# Altium PCB FAT90V2(kontroller_only).PcbDoc (part 1 of 2)
Units mm, origin at the board's own origin, x right, y up, seen from the top; angles counter-clockwise.
Board outline 187.3 x 121.8 mm, 2 copper layers (Top Layer, Bottom Layer); 106 components, 130 nets, 363 pads, 457 vias.
Unrouted connection lines stored in the file: 5.
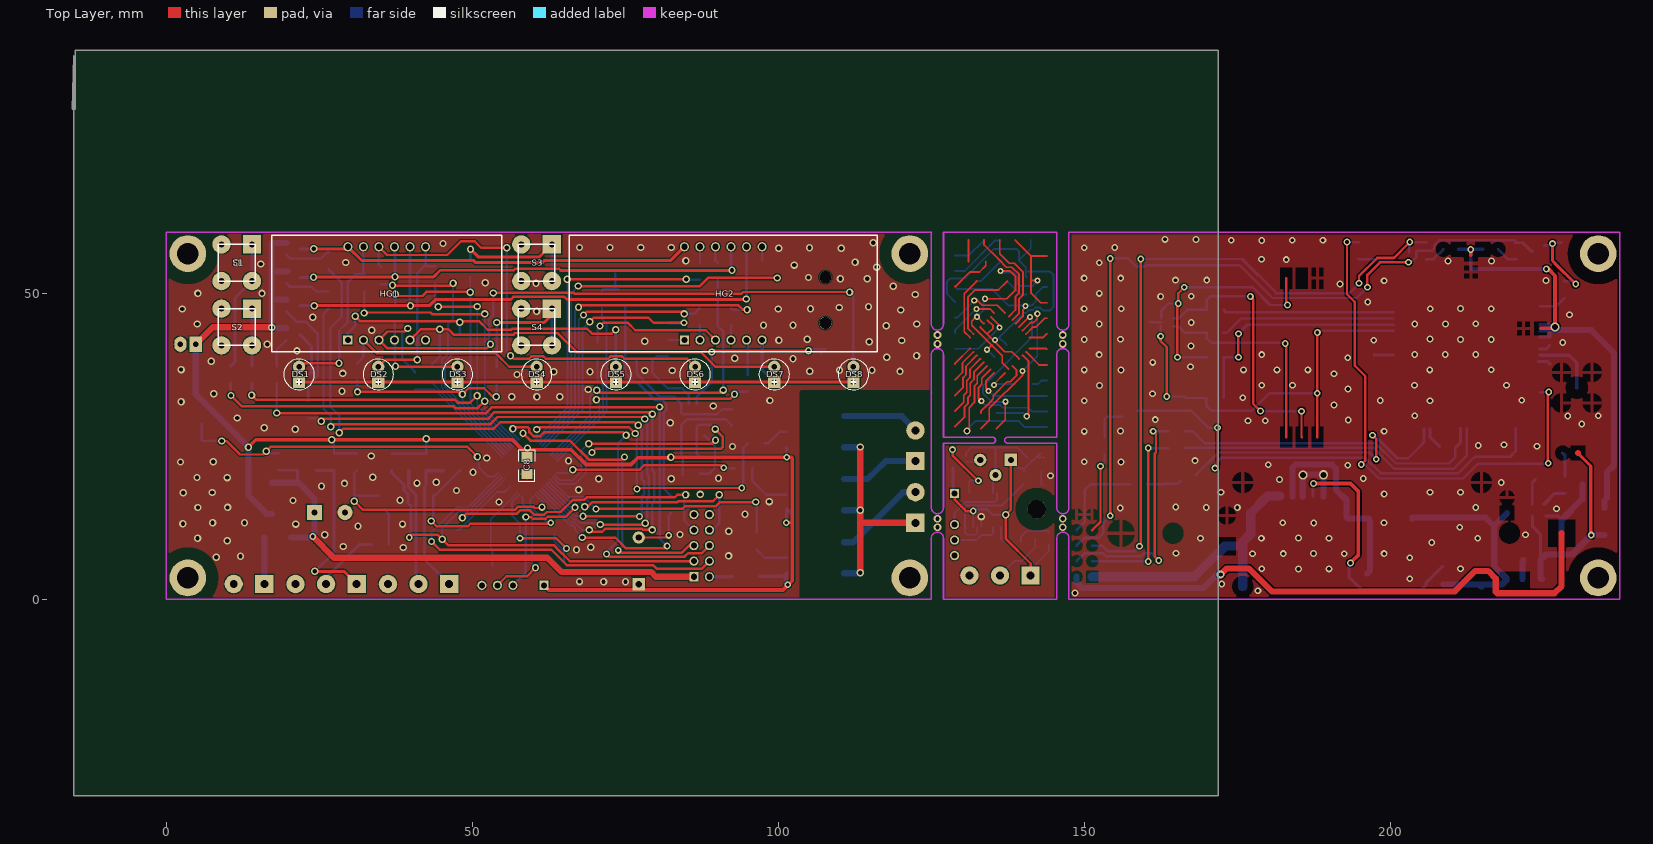
[diagram p0: Top Layer view]
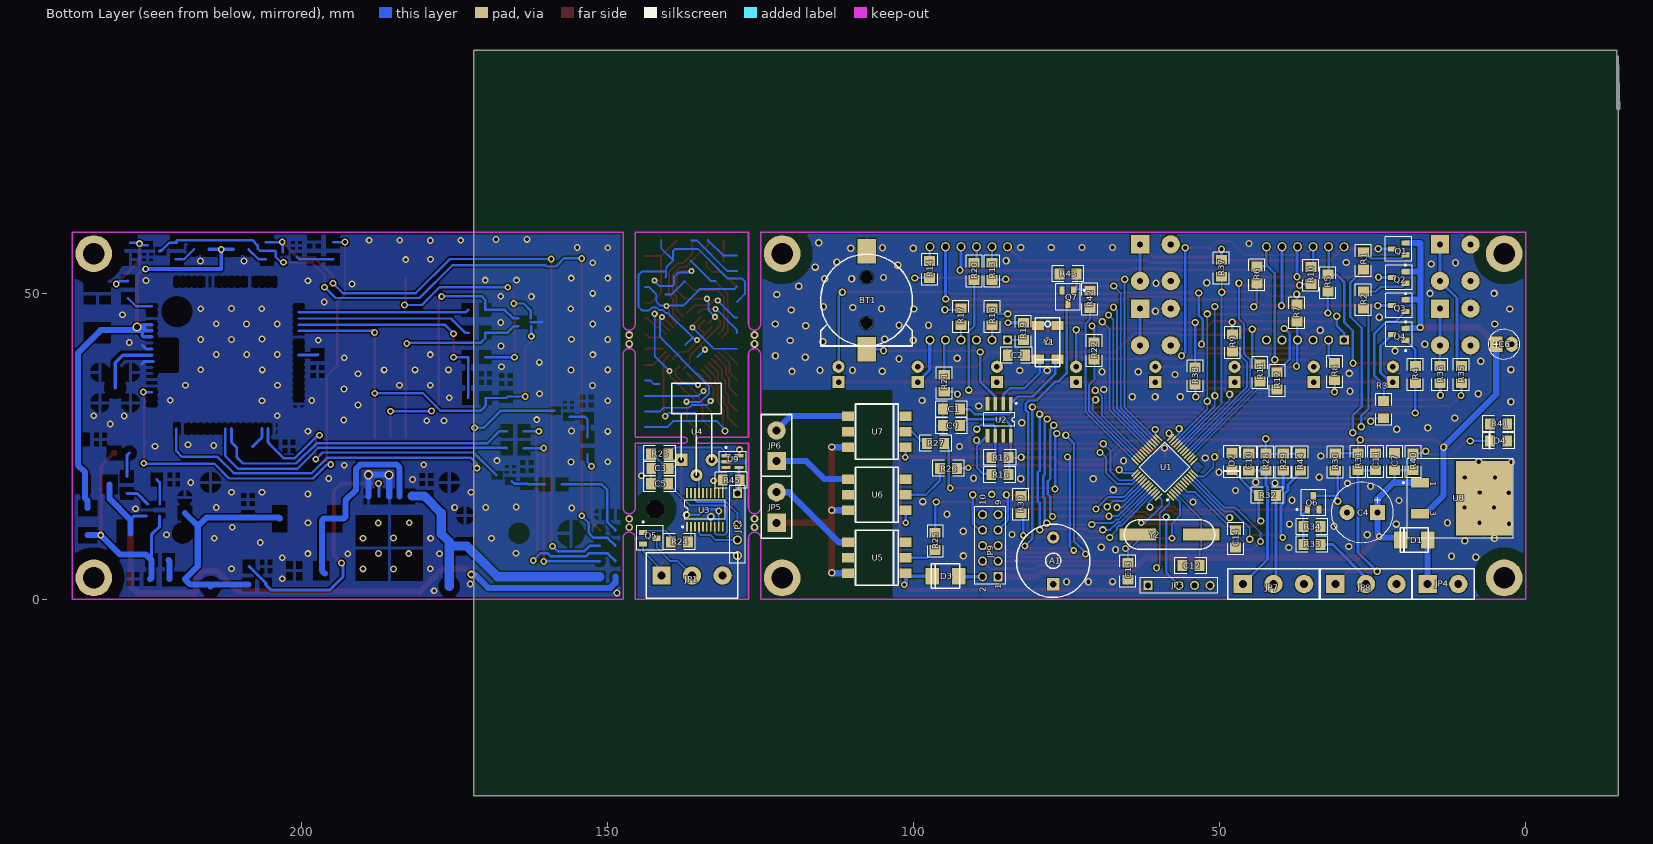
[diagram p1: Bottom Layer view, seen from below]

## Layer stack, top to bottom
Top Layer: signal copper 0.0356
Dielectric: dielectric 0.32, FR-4, Dk 4.8
Bottom Layer: signal copper 0.0356

## Board outline
-15.15,88.8 -15.15,-32.075 171.925,-32.075 171.925,89.725 -14.925,89.725 -14.925,80.075 -15.375,80.075

## Design rules (kind name [scope] priority, off if disabled: settings)
Clearance Clearance_1 [HasPad('Free-0') vs InPoly] p1: gap=2
Clearance [All] p2: gap=0.2
ComponentClearance [All] p1: gap=0.254 collisioncheckmode=0
HoleSize [All] p1: absolutevalues=TRUE maxlimit=5 minlimit=0.025 maxpercent=80.000 minpercent=20.000
PolygonConnect [All] p1: connectstyle=Relief reliefconductorwidth=0.254 reliefentries=4 polygonreliefangle="90 Angle"
RoutingLayers [All] p1: top layer=Horizontal bottom layer=Vertical
RoutingVias [All] p1: holewidth=0.6 width=1.1 viastyle="Through Hole" minholewidth=0.6 minwidth=1.1 maxholewidth=1 maxwidth=1.5
SolderMaskExpansion [All] p1: expansion=0.102
TestPointUsage [All] p1: valid=0 allowmultiple=FALSE
Testpoint [All] p1: side=15 testpointundercomponent=TRUE minsize=1.016 maxsize=2.54 preferedsize=1.524 minholesize=0 maxholesize=1.016 preferedholesize=0.813 testpointgrid=0.025 style=1023 order=1234567890
Width [All] p1: maxlimit=3 minlimit=0.2 preferedwidth=0.254 toplayer_prefwidth=1 bottomlayer_prefwidth=1 minimp=50.000000 maximp=50.000000 favimp=50.000000
15 further rules are at their usual default settings.

## Classes and differential pairs
component class main: A1 BT1 C1 C2 C4 C6 C7 C8 C9 C10 C11 C12 C13 C14 D1 D2 D3 D4 DS1 DS2 DS3 DS4 DS5 DS6 DS7 DS8 HG1 HG2 JP3 JP4 JP5 JP6 JP7 JP8 JP? Q1 Q2 Q3 Q4 Q6 Q7 R1 R2 R3 R4 R5 R6 R7 R8 R9 R10 R11 R12 R13 R14 R15 R16 R17 R18 R19 R20 R21 R22 R25 R26 R27 R28 R29 R30 R31 R32 R33 R34 R35 R36 R37 R38 R39 R40 R41 R42 R43 R44 S1 S2 S3 S4 U1 U2 U5 U6 U7 U8 Y1 Y2
component class Dat: C3 C5 JP1 JP2 Q5 R23 R24 R45 U3 U4 U9
component class AM: C200 C201 C202 C203 JP200 JP201 JP202 JP203 R200 R201 U200 Y200

## Components (designator, comment, footprint, x,y, rotation, side; value= is the part's Value field where it differs from the comment)
A1 "HCM1205X" zumm 77.2,6.3 r90 bottom
BT1 "CR1220" 1220_holder 107.7,48.9 r270 bottom
C1 "22pF" _1206 93.8,31.1 r180 bottom
C2 "22pF" _1206 83.2,39.9 r180 bottom
C3 "1.0x16" _1206 141.5,21.4 r0 bottom
C4 "470x25" el5 29.2,14.2 r180 bottom
C5 "1.0x16" _1206 141.5,18.9 r180 bottom
C6 "220x16" el3#1 4.8,41.7 r180 bottom
C7 "1.0x16" _1206 21.4,22.5 r270 bottom
C8 "1.0x16" _1206 58.9,21.9 r90 top
C9 "1.0x16" _1206 93.8,28.4 r180 bottom
C10 "1.0x16" _1206 45.25,22.425 r90 bottom
C11 "1.0x16" _1206 24.5,22.5 r90 bottom
C12 "10pF" _1206 54.7,5.5 r180 bottom
C13 "10pF" _1206 65,4.6 r90 bottom
C14 "1.0x16" _1206 47.4,9.9 r90 bottom
D1 "STPS1H100" mbrs140 18.2,9.7 r180 bottom
D2 "C4V7" _1206d 48,22.5 r90 bottom
D3 "STPS1H100" MBRS140 94.8,3.8 r180 bottom
D4 "C4V7" _1206d 4.4,25.9 r180 bottom
DS1 "LED0" el3#2 21.675,35.5 r90 top
DS2 "LED0" el3#2 34.618,35.5 r90 top
DS3 "LED0" el3#2 47.561,35.5 r90 top
DS4 "LED0" el3#2 60.504,35.5 r90 top
DS5 "LED0" el3#2 73.446,35.5 r90 top
DS6 "LED0" el3#2 86.389,35.5 r90 top
DS7 "LED0" el3#2 99.332,35.5 r90 top
DS8 "LED0" el3#2 112.275,35.5 r90 top
HG1 "HS310561K" HS310561K 36,50 r0 top
HG2 "HS410561K" HS410561K 91,50 r0 top
JP1 "DG306-5.0-03P" BT5-3 141.224,3.9 r180 bottom
JP2 "" HDR1X5_uart 128.8,17.3 r270 bottom
JP3 "" HDR1X5_uart 61.7,2.3 r180 bottom
JP4 "DG306-5.0-02P" BT5-2 16.012,2.5 r180 bottom
JP5 "DG306-5.0-02P" BT5-2 122.4,12.506 r90 bottom
JP6 "DG306-5.0-02P" BT5-2 122.4,22.6 r90 bottom
JP7 "DG306-5.0-03P" BT5-3 46.2,2.5 r180 bottom
JP8 "DG306-5.0-03P" BT5-3 31.1,2.5 r180 bottom
JP9 "PBD-10" HDR2X5 86.2,3.7 r90 bottom (schematic designator JP500)
Q1 "BC807" SO-G3#1 20.75,57.274 r90 bottom
Q2 "BC807" SO-G3#2 15.7,52.6 r90 bottom
Q3 "BC807" SO-G3#1 20.7,48 r90 bottom
Q4 "BC807" SO-G3#1 20.7,43.3 r90 bottom
Q5 "BC807" SO-G3#1 143.1,10 r270 bottom
Q6 "BC847" SO-G3#1 34.7,15.8 r180 bottom
Q7 "BC847" SO-G3#1 74.8,49.4 r0 bottom
R1 "3K0" _1206 26.5,55.3 r270 bottom
R2 "3K0" _1206 26.5,48.9 r270 bottom
R3 "3K0" _1206 23.2,31 r270 bottom
R4 "3K0" _1206 18,36.7 r270 bottom
R5 "100R" _1206 32.3,51.7 r270 bottom
R6 "100R" _1206 43.9,53 r270 bottom
R7 "100R" _1206 37.4,46.8 r90 bottom
R8 "100R" _1206 31.2,37.2 r270 bottom
R9 "100R" _1206 47.9,41.9 r270 bottom
R10 "100R" _1206 35.1,52.9 r270 bottom
R11 "100R" _1206 43.4,37 r270 bottom
R12 "100R" _1206 40.6,35.7 r270 bottom
R13 "100R" _1206 87.2,53.6 r270 bottom
R14 "100R" _1206 97.4,53.9 r270 bottom
R15 "5K1" _1206 85.925,23.175 r0 bottom
R16 "5K1" _1206 85.925,20.375 r0 bottom
R17 "100R" _1206 92.3,46.2 r90 bottom
R18 "100R" _1206 87.2,46.2 r90 bottom
R19 "100R" _1206 82.1,43.8 r90 bottom
R20 "100R" _1206 90.1,53.6 r270 bottom
R21 "100R" _1206 95,35.3 r270 bottom
R22 "100R" _1206 70.5,40.6 r270 bottom
R23 "3K0" _1206 141.5,23.8 r180 bottom
R24 "3K0" _1206 138.3,9.4 r0 bottom
R25 "K51" _1206 96.5,9.5 r90 bottom
R26 "K51" _1206 94.3,21.4 r180 bottom
R27 "K51" _1206 96.4,25.5 r180 bottom
R28 "100R" _1206 42.45,22.425 r90 bottom
R29 "5K1" _1206 39.6,22.4 r270 bottom
R30 "3K0" _1206 31.1,22.4 r270 bottom
R31 "10R" _1206 27.4,22.5 r90 bottom
R32 "100R" _1206 42.2,17 r180 bottom
R33 "5K1" _1206 34.9,9 r180 bottom
R34 "10K" _1206 34.9,11.9 r180 bottom
R35 "1K0" _1206 10.5,36.7 r270 bottom
R36 "1K0" _1206 14,36.7 r270 bottom
R37 "1K0" _1206 49.7,54.1 r270 bottom
R38 "1K0" _1206 54,36.5 r270 bottom
R39 "22R" _1206 82.5,15.5 r90 bottom
R40 "10K" _1206 18.4,22.5 r90 bottom
R41 "5K1" _1206 4.4,28.7 r180 bottom
R42 "5K1" _1206 71.2,49.025 r270 bottom
R43 "10K" _1206 74.8,53.2 r0 bottom
R44 "2K0" _1206 36.8,22.4 r270 bottom
R45 "3K0" _1206 129.8,19.5 r180 bottom
S1 "SWT-6-13mm" SWT-6 14,58 r270 top
S2 "SWT-6-13mm" SWT-6 14,47.5 r270 top
S3 "SWT-6-13mm" SWT-6 63,58 r270 top
S4 "SWT-6-13mm" SWT-6 63,47.5 r270 top
U1 "STM8S007C8" F-QFP7X7-G48/X.3N 59,21.6 r45 bottom
U2 "DS1307Z" SO-G8/Z7.45 86.025,29.375 r0 bottom
U3 "STM8S103F" TSSO6x6-G20/Y1.6 134.124,14.6 r180 bottom
U4 "DS18B20" DS18B20_H 138,20.3 r90 bottom
U5 "MOC3083S" smdip6 106.025,6.8 r90 bottom
U6 "MOC3083S" smdip6 106.025,17.1 r90 bottom
U7 "MOC3083S" smdip6 106.025,27.4 r90 bottom
U8 "MC7805ACD2T" D2PAK 12,16.5 r270 bottom
U9 "DS1775" SO-G5/P.95 129.6,22.5 r270 bottom
Y1 "32768" TMXLi-206 78.1,42 r180 bottom
Y2 "10MGz" hc49/us 58.2,10.6 r0 bottom

## Footprints (in the part's own frame and the unit in brackets; to place one, negate y for a bottom-side part, rotate by r counter-clockwise, add the part's x,y. Pads: shape width x height; smd on the part's side, far side on the other; paste and mask are expansions set on the pad)
1220_holder [mm]
  round 2 hole 2: 0(-3.75,0) 0(3.75,0)
  rect 4x3 smd: 1(8,0) 2(-8,0)
  silkscreen extent -7.5,-7.5 7.52,7.5
_1206 [mm]
  rect 1.6x1.8 smd: 1(-1.412,-0.007) 2(1.388,-0.007)
  silkscreen extent -2.61,-1.31 2.59,1.29
_1206d [mm]
  rect 1.6x1.8 smd: 1(1.395,-0.009) 2(-1.405,-0.009)
  silkscreen extent -2.6,-1.31 2.6,1.29
BT5-2 [mm]
  rect 3x3 hole 1.3: 1(0.006,0.008)
  round 3 hole 1.3: 2(5.006,0.008)
  silkscreen extent -2.49,-2.49 7.61,2.51
BT5-3 [mm]
  round 2 on Bottom Overlay: 0(-0.001,-4.001)
  rect 3x3 hole 1.3: 1(-0.001,-0.001)
  round 3 hole 1.3: 2(4.999,-0.001) 3(9.999,-0.001)
  silkscreen extent -2.5,-3.75 12.5,3.75
D2PAK [mm]
  rect 1.5x3 smd: 1(-2.558,-5.253) 3(2.522,-5.253)
  rect 12.2x9.3 smd: 4(-0.018,5.247)
  silkscreen extent -6.52,-8.1 6.48,10
DS18B20_H [mm]
  rect 2x2 hole 1: 1(2.5,0)
  round 2 hole 1: 2(0,-2.5) 3(2.5,-5)
  silkscreen extent 0,-6.53 15,1.53
el3#1 [mm]
  rect 2x2.5 hole 0.9: 1(0.011,-0.008)
  oval 2x2.5 hole 0.9: 2(2.511,-0.008)
  silkscreen extent -1.24,-2.51 3.76,2.49
el3#2 [mm]
  rect 2x2 hole 0.9: 1(0.011,-0.008)
  round 2 hole 0.9: 2(2.511,-0.008)
  silkscreen extent -1.24,-2.51 3.76,2.49
el5 [mm]
  rect 2.5x2.5 hole 1: 1(5.001,0.007)
  round 2.5 hole 1: 2(0.001,0.007)
  silkscreen extent -2.5,-4.99 7.5,5.01
F-QFP7X7-G48/X.3N [mm]
  rect 1.6x0.3 smd: 1(-4.1,2.75) 2(-4.1,2.25) 3(-4.1,1.75) 4(-4.1,1.25) 5(-4.1,0.75) 6(-4.1,0.25) 7(-4.1,-0.25) 8(-4.1,-0.75) 9(-4.1,-1.25) 10(-4.1,-1.75) 11(-4.1,-2.25) 12(-4.1,-2.75) 25(4.1,-2.75) 26(4.1,-2.25) 27(4.1,-1.75) 28(4.1,-1.25) 29(4.1,-0.75) 30(4.1,-0.25) 31(4.1,0.25) 32(4.1,0.75) 33(4.1,1.25) 34(4.1,1.75) 35(4.1,2.25) 36(4.1,2.75)
  rect 0.3x1.6 smd: 13(-2.75,-4.1) 14(-2.25,-4.1) 15(-1.75,-4.1) 16(-1.25,-4.1) 17(-0.75,-4.1) 18(-0.25,-4.1) 19(0.25,-4.1) 20(0.75,-4.1) 21(1.25,-4.1) 22(1.75,-4.1) 23(2.25,-4.1) 24(2.75,-4.1) 37(2.75,4.1) 38(2.25,4.1) 39(1.75,4.1) 40(1.25,4.1) 41(0.75,4.1) 42(0.25,4.1) 43(-0.25,4.1) 44(-0.75,4.1) 45(-1.25,4.1) 46(-1.75,4.1) 47(-2.25,4.1) 48(-2.75,4.1)
  silkscreen extent -4.22,-2.9 2.9,3.57
hc49/us [mm]
  rect 6x2 smd: 1(-5.2,0) 2(5.2,0)
  silkscreen extent -7.4,-2.4 7.4,2.4
HDR1X5_uart [mm]
  rect 1.5x1.5 hole 1: 1(-0.008,-0.009)
  round 1.5 hole 1: 3(5.072,-0.009) 4(7.612,-0.009) 5(10.152,-0.009)
  silkscreen extent -1.28,-1.28 11.42,1.26
HDR2X5 [mm]
  rect 1.5x1.5 hole 1: 1(0,0)
  round 1.5 hole 1: 2(0,2.54) 3(2.54,0) 4(2.54,2.54) 5(5.08,0) 6(5.08,2.54) 7(7.62,0) 8(7.62,2.54) 9(10.16,0) 10(10.16,2.54)
  silkscreen extent -1.27,-1.27 11.43,3.81
HS310561K [mm]
  rect 1.5x1.5 hole 1: 1(-6.35,-7.62)
  round 1.5 hole 1: 2(-3.81,-7.62) 3(-1.27,-7.62) 4(1.27,-7.62) 5(3.81,-7.62) 6(6.35,-7.62) 7(6.35,7.62) 8(3.81,7.62) 9(1.27,7.62) 10(-1.27,7.62) 11(-3.81,7.62) 12(-6.35,7.62)
  silkscreen extent -18.8,-9.5 18.8,9.5
HS410561K [mm]
  rect 1.5x1.5 hole 1: 1(-6.35,-7.62)
  round 1.5 hole 1: 2(-3.81,-7.62) 3(-1.27,-7.62) 4(1.27,-7.62) 5(3.81,-7.62) 6(6.35,-7.62) 7(6.35,7.62) 8(3.81,7.62) 9(1.27,7.62) 10(-1.27,7.62) 11(-3.81,7.62) 12(-6.35,7.62)
  silkscreen extent -25.2,-9.5 25.2,9.5
mbrs140 [mm]
  rect 2.2x2.7 smd: 1(2.2,0) 2(-2.2,0)
  silkscreen extent -2.3,-2.02 2.3,2
MBRS140 [mm]
  rect 2.2x2.7 smd: 1(2.2,0) 2(-2.2,0)
  silkscreen extent -2.3,-2.02 2.3,2
smdip6 [mm]
  rect 1.6x2 smd: 1(-2.54,-4.7) 2(0,-4.7) 3(2.54,-4.7) 4(2.54,4.7) 5(0,4.7) 6(-2.54,4.7)
  silkscreen extent -4.5,-3.5 4.5,3.5
SO-G3#1 [mm]
  rect 0.85x1.3 smd: 1(-0.948,-1.102) 2(0.952,-1.102) 3(0.002,1.098)
  silkscreen extent -2.77,-2.15 2,2.15
SO-G3#2 [mm]
  rect 0.85x1.3 smd: 1(-0.948,3.906) 2(0.952,3.906) 3(0.002,6.106)
  silkscreen extent -2.77,2.86 2,7.16
SO-G5/P.95 [mm]
  rect 0.55x1.45 smd: 1(-0.95,-1.075) 2(0,-1.075) 3(0.95,-1.075) 4(0.95,1.075) 5(-0.95,1.075)
  silkscreen extent -2.42,-2.2 1.65,2.2
SO-G8/Z7.45 [mm]
  rect 0.6x2.2 smd: 1(-1.905,-2.625) 2(-0.635,-2.625) 3(0.635,-2.625) 4(1.905,-2.625) 5(1.905,2.625) 6(0.635,2.625) 7(-0.635,2.625) 8(-1.905,2.625)
  silkscreen extent -2.88,-2.79 2.5,1.13
SWT-6 [mm]
  rect 3x3 hole 1: 1(-0.009,-0.001)
  round 3 hole 1: 1(5.991,-0.001) 2(-0.009,-5.001) 2(5.991,-5.001)
  silkscreen extent -0.01,-5.5 5.99,0.5
TMXLi-206 [mm] "TMXLi-206"
  rect 2x1.5 smd: 1(-1.6,-2.75) 2(1.6,-2.75) 3(1.6,2.75) 4(-1.6,2.75)
  silkscreen extent -2,-4 2,4
TSSO6x6-G20/Y1.6 [mm]
  rect 0.3x1.6 smd: 1(-2.934,-2.743) 2(-2.284,-2.743) 3(-1.634,-2.743) 4(-0.984,-2.743) 5(-0.334,-2.743) 6(0.316,-2.743) 7(0.966,-2.743) 8(1.616,-2.743) 9(2.266,-2.743) 10(2.916,-2.743) 11(2.916,2.757) 12(2.266,2.757) 13(1.616,2.757) 14(0.966,2.757) 15(0.316,2.757) 16(-0.334,2.757) 17(-0.984,2.757) 18(-1.634,2.757) 19(-2.284,2.757) 20(-2.934,2.757)
  silkscreen extent -3.76,-2.87 3.29,1.56
zumm [mm]
  rect 2x2 hole 1: 1(-3.825,0)
  round 2 hole 1: 2(3.81,0)
  silkscreen extent -6,-6 6,6

## Part data
A1: library part PJEZ0, "Beeper"
BT1: library part Battery, "Multicell Battery"
C1 C2 C3 C5 C12 C13 C14: library part "Cap Semi", "Capacitor"
C4: library part "Cap Pol1", "Polarized Capacitor (Radial)"
C6: library part "Cap Pol", "Polarized Capacitor (Radial)"
C7 C8 C9 C10 C11: library part Cap, "Capacitor"
D1 D3: library part 10BQ015, "Schottky Rectifier"
D2 D4: library part "D Zener", "Zener Diode"
DS1 DS2 DS3 DS4 DS5 DS6 DS7 DS8: "Typical INFRARED GaAs LED"
JP1 JP7 JP8: library part "Header 3", "Header, 3-Pin"
JP2 JP3: library part SWIM_CONN
JP4 JP5 JP6: library part "Header 2", "Header, 2-Pin"
JP9: library part "Header 10", "Header, 10-Pin"
Q1 Q2 Q3 Q4 Q5: library part BC857ALT1, "General Purpose Transistor PNP Silicon"
Q6 Q7: library part BC847ALT1, "General Purpose Transistor NPN Silicon"
R1 R2 R3 R4 R5 R6 R7 R8 R9 R10 R11 R12 R13 R14 R15 R16 R17 R18 R19 R20 R21 R22 R23 R24 R25 R26 R27 R28 R29 R30 R31 R32 R33 R34 R35 R36 R37 R38 R39 R40 R41 R42 R43 R44 R45: library part Res2, "Resistor"
S1 S2 S3 S4: library part SWT-6, "Switch"
U2: "64 X 8 Serial Real-Time Clock"
U5 U6 U7: library part "Opto TRIAC", "Opto-Triac"
U8: "Three-Terminal Positive Voltage Regulator"
Y1 Y2: library part XTAL, "Crystal Oscillator"

## Free pads (board coordinates)
  round 6 hole 3.5: 0(3.5,3.5) 0(3.5,56.5) 0(121.5,56.5) 1(121.5,3.5) 4(234,3.5) 4(234,56.5)
  round 3 hole 3: 0(142.25,14.725)

## Via types
v1: diameter 1.2, hole 0.7, Top Layer to Bottom Layer, 232 vias
v2: diameter 1.1, hole 0.6, Top Layer to Bottom Layer, 195 vias
v3: diameter 1, hole 0.5, Top Layer to Bottom Layer, 18 vias
v4: diameter 1.27, hole 0.7, Top Layer to Bottom Layer, 8 vias
v5: diameter 1.5, hole 1, Top Layer to Bottom Layer, 3 vias
v6: diameter 1.3, hole 0.7, Top Layer to Bottom Layer, 1 vias

## Nets (pads, with @x,y where several pads share a name; then routed paths per layer and width w, separated by ;. In a path a pad name is that pad's centre, name@x,y a point inside that pad or via, vN(x,y) a via of type N, cw(c..) or ccw(c..) an arc to the next point about the centre after c; other vN are vias at no path point)
+5V: A1.1 C6.1 C8.2 C9.2 D3.2 JP3.1 Q1.2 Q2.2 Q3.2 Q4.2 R15.1 R16.1 R28.2 R29.1 R30.1 R31.2 R44.1 U1.7 U1.8 U1.13 U1.32 U2.8 U5.1 U6.1 U7.1 U8.3 | length 271.2
  Top Layer w0.4: v2(101.3,12.525) 101.325,12.5 102.29,12.5
  Top Layer w0.6: v1@13.388,24.863 14.6,26.075 56.55,26.075 58.2,24.425 66.175,24.425 68.575,22.025 75.925,22.025 77.05,23.15 v1@82.4,23.15 ; v2@58.9,24.425 v2@58.907,24.418 ; C8.2@58.907,23.287 58.907,24.607 v2(59.025,24.725) ; JP3.1@61.708,2.291 62.473,1.525 100.775,1.525 102.29,3.04 102.29,23.085 102.175,23.2 v1(82.45,23.2)
  Top Layer w1: C6.1@4.789,41.692 7.572,44.475 17.25,44.475 v1(17.2,44.425)
  Bottom Layer w0.4: v1(27,26.075) 27.393,25.682 R31.2@27.393,23.888 31.031,23.888 R30.1@31.107,23.812 ; R44.1@36.806,23.812 R29.1@39.607,23.812 R28.2@42.443,23.813 ; R28.2@42.443,23.813 42.443,26.193 v1(42.475,26.225) ; v1(82.45,23.2) 82.55,23.1 R15.1@84.375,23.1 ; R16.1@84.375,20.375 84.375,23.319 84.12,23.574 84.12,28.425 85.095,29.4 91.406,29.4 C9.2@92.412,28.393 ; v2(101.3,12.525) 101.325,12.55 U6.1@101.325,14.56 ; U7.1@101.325,24.86 101.325,23.3 v2(101.4,23.225)
  Bottom Layer w0.6: D3.2@97,3.8 100.865,3.8 U5.1@101.325,4.26 ; U5.1@100.975,3.8 U5.1@101.025,3.75 ; U5.1@101.025,3.8 101.087,3.862 101.25,4.025 101.25,2.7 v2(101.55,2.4) ; U7.1@101.375,24.5 U7.1@101.4,24.525 ; U6.1@101.4,14.75 U6.1@102.1,14.05
  Bottom Layer w1: C6.1@4.789,41.692 4.789,33.511 v1@13.425,24.875 ; v1@13.425,24.85 13.425,16.95 16.397,13.978 U8.3@17.253,13.978 ; 17.2,49 19.549,49 Q3.2@19.598,48.952 ; 17.2,53.575 19.675,53.575 Q2.2@19.75,53.65 ; Q4.2@19.598,44.252 19.524,44.325 17.2,44.325 17.2,58.201 17.224,58.226 Q1.2@19.648,58.226
  other v1: 13.4,24.85
+5VA:  | length 55
  Top Layer w0.3: 133.592,45.065 v3(132.482,46.175) 132.3,46.175 131.6,45.475 131.6,44.794 136.6,39.794 136.6,38.663 137.658,37.605 ; v3(133.775,49.125) 137.325,49.125 138.75,50.55 138.75,52.8 137.9,53.65 v3(136.3,53.65) ; v3(134.125,40.8) 134.875,41.55 134.9,41.55 ; 138.72,58.7 141.32,56.1 ; 141.32,52.125 141.345,52.1 v3(142.375,52.1) ; 143.9,48.48 142.895,48.48 141.32,50.055 141.32,56.1 ; 143.9,56.1 141.32,56.1
  Bottom Layer w0.3: v3(132.482,46.175) 133.525,47.218 133.525,49.044 133.688,49.207 133.718,49.207 133.775,49.15 v3(133.775,49.125) ; v3(134.125,40.8) 135.311,39.614 135.323,39.614 ; v3(136.3,53.65) 136.525,53.425 138.5,53.425 139.175,52.75 139.175,51.425 139.4,51.2 141.475,51.2 v3(142.375,52.1)
+12V: C4.1 C7.2 D1.2 JP9.1 R40.1 U8.1 | length 88.3
  Top Layer w1: v2(23.9,10.275) 27.375,6.8 62.225,6.8 64.55,4.475 79.2,4.475 79.975,3.7 JP9.1@86.2,3.7
  Bottom Layer w0.4: R40.1@18.393,21.088 21.382,21.088 C7.2@21.407,21.112
  Bottom Layer w0.5: 21.325,19.058 21.407,19.14 C7.2@21.407,21.112
  Bottom Layer w1: U8.1@17.253,19.058 21.617,19.058 24.199,16.476 24.199,10.624 v2@23.975,10.4 ; D1.2@20.4,10.1 23.674,10.1 23.874,10.301 23.974,10.401 v2@24.199,10.625
A1: HG1.12 HG2.12 Q1.3 | length 65.1
  Top Layer w0.5: v1(24.074,57.276) 29.306,57.276 HG1.12@29.65,57.62 31.87,55.4 50.15,55.4 50.525,55.025 61.45,55.025 61.825,55.4 82.43,55.4 HG2.12@84.65,57.62
  Bottom Layer w0.5: Q1.3@21.848,57.276 v1(24.074,57.276)
A2: HG1.9 HG2.9 Q2.3 | length 80.2
  Top Layer w0.4: 44.725,53.75 56.7,53.75 56.975,54.025 64.2,54.025 64.45,53.775
  Top Layer w0.5: v1(24.05,52.65) 37.3,52.65 v1(37.35,52.7) 43.675,52.7 44.725,53.75 ; 64.45,53.775 v1(92.425,53.775) v1@92.4,53.75
  Bottom Layer w0.5: Q2.3@21.806,52.602 24.002,52.602 v1(24.05,52.65) ; HG1.9@37.27,57.62 37.35,57.54 v1(37.35,52.7) ; HG2.9@92.27,57.62 92.27,53.93 v1(92.425,53.775)
A3: HG1.8 HG2.8 Q3.3 | length 92.1
  Top Layer w0.4: 56.3,49.025 56.7,49.425 65.05,49.425 65.45,49.025 65.7,49.025
  Top Layer w0.5: v1(24.175,48) 42.975,48 44,49.025 56.3,49.025 ; 65.7,49.025 94.775,49.025 94.8,49.05 94.825,49.075 v1(94.775,49.075)
  Bottom Layer w0.5: Q3.3@21.798,48.002 23.923,48.002 23.925,48 v1(24.175,48) ; HG1.8@39.81,57.62 39.81,48.09 v1(39.9,48) ; v1(94.775,49.075) 94.81,49.11 HG2.8@94.81,57.62
A4: DS1.1 DS2.1 DS3.1 DS4.1 DS5.1 DS6.1 DS7.1 DS8.1 HG2.6 Q4.3 | length 108
  Top Layer w0.5: DS1.1@21.683,35.511 DS8.1@112.283,35.511
  Bottom Layer w0.5: DS1.1@21.683,35.511 22.161,35.511 23.725,37.075 23.725,41.374 Q4.3@21.798,43.302 ; HG2.6@97.35,42.38 97.375,42.355 97.375,37.477 DS7.1@99.34,35.511
AA: DS1.2 HG1.11 R5.1 | length 28.4
  Top Layer w0.4: DS1.2@21.683,38.011 22.272,38.6 28.175,38.6 v1(28.2,38.575)
  Bottom Layer w0.4: v1(28.2,38.575) 28.25,38.625 28.25,43.9 29.65,45.3 29.65,51.875 30.887,53.112 R5.1@32.307,53.112 32.19,53.229 HG1.11@32.19,57.62
AB: HG2.11 R13.1 | length 2.6
  Bottom Layer w0.4: HG2.11@87.19,57.62 87.207,57.603 R13.1@87.207,55.012
ADC4:  | length 26.6
  Top Layer w0.3: 133.1,27.9 134.475,29.275 134.475,31.2 139.925,36.65 v3(139.925,37.325) ; 139.92,43.934 141.212,45.225 141.7,45.225 142.325,45.85 v3(142.325,46.675)
  Bottom Layer w0.3: v3(139.925,37.325) 142.325,39.725 v3(142.325,46.675)
ADC5:  | length 28
  Top Layer w0.3: 135.64,27.9 137.1,29.36 137.1,32.25 v3(137.15,32.3) ; 139.355,44.499 139.355,44.53 v3@141.125,46.3
  Bottom Layer w0.3: v3(137.15,32.3) 137.1,32.25 134.85,32.25 133.425,33.675 133.425,34.8 134.617,35.992 141.45,42.825 141.45,45.975 v3@141.125,46.3
  other v3: 141.15,46.125
ADC6:  | length 10.7
  Top Layer w0.3: 133.1,30.44 133.1,30.725 134.524,32.149 135.125,32.75 135.125,33.3 137.375,35.55 137.875,35.55 138.9,36.575 138.9,37.494 138.223,38.171
ADC7:  | length 15.6
  Top Layer w0.3: 139.921,39.868 140.9,38.888 140.9,30.225 v3(140.6,29.925)
  Bottom Layer w0.3: 135.64,30.44 140.085,30.44 v3(140.6,29.925)
BA: DS2.2 HG1.7 R6.1 | length 27.5
  Top Layer w0.4: DS2.2@34.626,38.011 35.79,39.175 v1(41,39.175)
  Bottom Layer w0.4: v1(41,39.175) 41.025,39.2 41.025,53.3 42.35,54.625 ; HG1.7@42.35,57.62 42.35,54.625 ; R6.1@43.907,54.412 42.563,54.412 42.35,54.625
BB: HG2.7 R14.1 | length 2.3
  Bottom Layer w0.4: HG2.7@97.35,57.62 97.35,55.369 R14.1@97.407,55.312
CA: DS3.2 HG1.4 R7.1 | length 17.6
  Top Layer w0.4: v1(37.45,38.075) 37.514,38.011 DS3.2@47.569,38.011
  Bottom Layer w0.4: R7.1@37.393,45.388 37.3,45.294 37.3,38.225 v1(37.45,38.075)
CB: HG2.4 R17.1 | length 2.4
  Bottom Layer w0.4: HG2.4@92.27,42.38 92.27,44.764 R17.1@92.293,44.788
DA: DS4.2 HG1.2 R8.1 | length 34.3
  Top Layer w0.4: HG1.2@32.19,42.38 34.395,40.175 53.875,40.175 56.039,38.011 DS4.2@60.512,38.011
  Bottom Layer w0.4: R8.1@31.207,38.612 32.19,39.596 HG1.2@32.19,42.38
DB: HG2.2 R18.1 | length 2.4
  Bottom Layer w0.4: HG2.2@87.19,42.38 87.19,44.784 R18.1@87.193,44.788
DTR:  | length 3.5
  Top Layer w0.3: 131.1,58.7 131.1,55.219 131.112,55.207
EA: DS5.2 HG1.1 R9.1 | length 56.8
  Top Layer w0.4: v1(30.85,46.25) 31.625,45.475 51.1,45.475 52.525,44.05 56.375,44.05 56.525,44.2 68.775,44.2 69.55,43.425 72.775,43.425 v1(73.425,44.075) ; v1@47.775,45.475 v1(47.95,45.3)
  Bottom Layer w0.4: HG1.1@29.65,42.38 29.65,43.5 30.85,44.7 v1(30.85,46.25) ; R9.1@47.907,43.312 v1@47.907,45.257 ; v1(73.425,44.075) 73.455,44.045 DS5.2@73.455,38.011
EB: HG2.1 R19.1 | length 2.6
  Bottom Layer w0.4: R19.1@82.093,42.388 84.642,42.388 HG2.1@84.65,42.38
FA: DS6.2 HG1.10 R10.1 | length 75.7
  Top Layer w0.4: HG1.10@34.73,57.62 36.075,56.275 45.9,56.275 48.15,58.525 50.375,58.525 51.45,57.45 v1(55.6,57.45) ; v1(56.225,39.825) 56.725,39.325 59.275,39.325 59.65,39.7 61.625,39.7 62,39.325 72.2,39.325 72.575,39.7 74.45,39.7 74.825,39.325 85.084,39.325 DS6.2@86.398,38.011
  Bottom Layer w0.4: HG1.10@34.73,57.62 34.73,54.689 R10.1@35.107,54.312 ; v1(55.6,57.45) 55.6,40.45 v1(56.225,39.825)
FB: HG2.10 R20.1 | length 2.8
  Bottom Layer w0.4: HG2.10@89.73,57.62 89.73,55.389 R20.1@90.107,55.012
GA: DS7.2 HG1.5 R11.1 | length 69.3
  Top Layer w0.4: HG1.5@39.81,42.38 41.58,44.15 46.1,44.15 47.025,43.225 56.7,43.225 57,43.525 63.925,43.525 67.075,40.375 87.35,40.375 89.714,38.011 DS7.2@99.34,38.011
  Bottom Layer w0.4: R11.1@43.407,38.412 44.65,39.656 v1(44.65,44.15)
GB: HG2.5 R21.1 | length 5.7
  Bottom Layer w0.4: HG2.5@94.81,42.38 95.007,42.183 R21.1@95.007,36.712
GND: BT1.2 C1.1 C2.1 C4.2 C6.2 C7.1 C8.1 C9.1 C10.2 C11.2 C12.1 C13.1 C14.1 D2.1 D4.1 JP3.5 JP4.2 JP7.3 JP8.3 JP9.9 JP9.10 Q6.2 Q7.2 R34.2 R41.2 R43.2 S1.2 S2.2 S3.2 S4.2 U1.4 U1.5 U1.14 U1.31 U2.4 U8.4
  other v1: 67.5,2.9 71.45,2.9 75.025,2.9 8.125,6.9 12.1,7.025 91.875,7.1 67.025,8.1 38.7,8.475 69.35,8.5 28.9,8.65 9.95,9.6 5.1,10 25.9,10.55 83.925,10.6 91.9,11.125 31.3,11.925 21.15,12.3 38.575,12.3 2.7,12.375 7.55,12.5 12.775,12.5 94.55,13.9 5.15,15 10,15.025 54.361,15.9 98.5,15.975 20.7,16.15 38.175,16.2 2.75,17.4 7.5,17.475 47.4,17.8 67.4,17.925 25.35,18.5 29.1,18.95 40.95,19 44.1,19.125 70.675,19.7 82.5,19.7 90.225,19.8 9.95,19.9 5,19.925 33.7,19.95 50.1,20.75 2.3,22.45 7.675,22.5 65.7,22.65 52.375,23.1 33.5,23.425 92.525,24.975 21.075,27.8 16,28.05 82.325,28.875 11.6,29.625 89.35,31.6 2.4,32.275 98.625,32.5 56.425,33.1 60.55,33.1 64.3,33.125 7.725,33.6 28.7,34.025 68.95,34.3 57.3,36.75 28.8,36.925 63.325,37.2 69.225,37.2 119.9,37.25 105.125,37.3 78.175,37.4 82.65,37.4 110,37.425 115.3,37.425 2.4,37.55 7.35,38.9 102.4,39.325 92.9,39.4 117.7,39.575 122.6,39.825 21.35,40.6 16.475,41.7 114.875,42.1 78.175,42.2 120.175,42.3 100.1,42.35 104.75,42.5 33.55,44 117.65,44.7 97.575,44.8 102.4,44.8 5.025,45 122.625,45 23.9,46.125 60.5,47.075 120.025,47.3 2.6,47.45 100,47.45 105.25,47.5 109.975,47.7 114.75,47.8 122.4,49.825 5.15,50 15.625,50 118.8,51.15 60.4,51.675 52.1,51.725 110.15,52.4 114.55,52.4 104.925,52.6 116.1,54.3 102.6,54.625 15.425,54.8 11.45,55 29.3,55.05 112.55,55.1 84.9,55.325 100.075,57.4 110.275,57.4 105.1,57.45 67.5,57.5 72.5,57.5 77.5,57.5 82.525,57.5 45.2,58.15 115.5,58.275
GNDA:  | length 62.6
  Top Layer w0.3: 133.026,44.499 133.026,44.449 137,40.475 138.182,40.475 139.355,39.302 ; 134.158,45.631 135.1,44.688 135.1,44.325 134.175,43.4 ; v3@135.239,42.236 v3(135.404,42.4)
  Bottom Layer w0.3: 128.9,48.58 127.575,49.905 127.575,51.95 128.05,52.425 130.4,52.425 135.25,57.275 138.95,57.275 139.312,56.913 139.312,55.393 ; v3(135.404,42.4) 135.725,42.4 140.1,46.775 140.475,46.775 141,47.3 141.625,47.3 142,47.675 142.8,47.675 143.275,47.2 144.375,47.2 144.95,47.775 144.95,53.05 144.44,53.56 140.49,53.56 140.45,53.6 ; 136.081,42.756 136.142,42.756 137.303,41.594 ; 140.607,52.612 140.45,52.769 140.45,54.256 139.312,55.393 ; 141.26,58.7 141.26,57.341 139.312,55.393
HA: DS8.2 HG1.3 R12.1 | length 112.8
  Top Layer w0.4: v1(39.425,44.275) 38.925,43.775 36.125,43.775 HG1.3@34.73,42.38 36.11,41 52.3,41 v1(52.975,41.675) ; v1@53.55,49.925 v1(53.4,50.075) 66.6,50.075 66.75,49.925 93.9,49.925 94.2,50.225 111.6,50.225 v1(111.65,50.175)
  Bottom Layer w0.4: v1(39.425,44.275) 38.55,43.4 38.55,39.25 40.607,37.193 R12.1@40.607,37.112 ; v1(52.975,41.675) 52.725,41.925 52.725,45.725 53.4,46.4 v1(53.4,50.075) ; v1(111.65,50.175) 112.283,49.542 DS8.2@112.283,38.011
HB: HG2.3 R22.1 | length 23
  Top Layer w0.4: v1(70.85,44.675) 70.875,44.675 71.375,45.175 75.425,45.175 76.625,43.975 88.135,43.975 HG2.3@89.73,42.38
  Bottom Layer w0.4: R22.1@70.507,42.012 70.507,44.332 v1(70.85,44.675)
IO2:  | length 10.2
  Top Layer w0.3: v3(132.025,48.825) 132.575,48.825 133.35,48.05 135.804,48.05 137.092,46.762
  Bottom Layer w0.3: 128.9,46.04 129.24,46.04 v3(132.025,48.825)
IO3:  | length 8.6
  Top Layer w0.3: v3@132.525,47.45 134.601,47.45 135.289,46.762
  Bottom Layer w0.3: 128.9,43.5 128.9,44.05 132.3,47.45 v3@132.525,47.45
  other v3: 132.4,47.45
IO4:  | length 11
  Top Layer w0.3: 134.723,46.196 136.125,44.795 v3(136.125,44.4)
  Bottom Layer w0.3: 128.9,40.96 132.685,40.96 v3(136.125,44.4)
IO5:  | length 3.6
  Top Layer w0.3: 128.9,38.42 128.9,38.57 131.329,40.999
IO6:  | length 5.8
  Top Layer w0.3: 128.9,35.88 130.1,37.08 130.1,38.639 131.895,40.433
IO7:  | length 8
  Top Layer w0.3: 128.9,33.34 130.2,34.64 130.2,36.25 130.675,36.725 130.675,38.082 132.461,39.868
IO8:  | length 10.2
  Top Layer w0.3: 128.9,30.8 130.3,32.2 130.3,33.35 130.8,33.85 130.8,35.75 131.325,36.275 131.325,37.601 133.026,39.302
IO9:  | length 12.4
  Top Layer w0.3: 128.9,28.26 130.45,29.81 130.45,31.475 130.975,32 130.975,32.95 131.375,33.35 131.375,35.325 131.975,35.925 131.975,37.119 133.592,38.736
IO10:  | length 26.3
  Top Layer w0.3: v2@131.2,27.875 131.2,31.325 132.05,32.175 132.05,34.85 132.525,35.325 132.525,36.538 134.158,38.171
  Top Layer w0.4: v2(130.85,27.525) v2@131.2,27.875
  Bottom Layer w0.3: v2(130.85,27.525) 130.85,27.775 132.2,29.125 139.325,29.125 140.29,28.16 143.9,28.16
IO11:  | length 17.6
  Top Layer w0.3: v3(133.175,32.4) 132.725,32.85 132.725,34.6 133.25,35.125 133.25,36.132 134.723,37.605
  Bottom Layer w0.3: v3(133.175,32.4) 133.825,31.75 136.3,31.75 136.75,31.3 140.875,31.3 141.475,30.7 143.9,30.7
IO12:  | length 13.6
  Top Layer w0.3: v3(134.375,34.05) 133.95,34.475 133.95,35.7 135.289,37.039
  Bottom Layer w0.3: v3(134.375,34.05) 135.185,33.24 143.9,33.24
IO13:  | length 2.6
  Bottom Layer w0.3: 141.512,35.193 142.468,35.193 143.055,35.78 143.9,35.78
IO13_:  | length 6.3
  Top Layer w0.3: v3(135.25,35) 135.25,35.197 137.092,37.039
  Bottom Layer w0.3: v3(135.25,35) 135.443,35.193 138.712,35.193
NetA1_2: A1.2 R39.1 | length 8.8
  Top Layer w0.4: A1.2@77.2,10.11 81.76,10.11 v2(82.1,10.45)
  Bottom Layer w0.4: v2(82.1,10.45) 82.1,13.694 R39.1@82.493,14.088
NetBT1_1: BT1.1 U2.3 | length 29.3
  Top Layer w0.4: v1(89.1,40.425) 89.325,40.65 v1(104.925,40.65)
  Bottom Layer w0.3: BT1.1@106.975,40.175 BT1.1@107.7,40.9
  Bottom Layer w0.4: U2.3@86.66,32 86.66,33.085 89.1,35.525 v1(89.1,40.425) ; v1(104.925,40.65) 105.175,40.9 BT1.1@107.7,40.9
NetC1_2: C1.2 U2.1 Y1.2 | length 21.8
  Bottom Layer w0.4: Y1.2@76.875,39.2 76.85,36.9 80.6,33.15 82.97,33.15 U2.1@84.12,32 84.12,30.53 84.4,30.25 90,30.25 90.843,31.093 C1.2@92.412,31.093
NetC2_2: C2.2 U2.2 Y1.1 | length 13.6
  Bottom Layer w0.4: C2.2@81.912,39.693 80.143,39.693 79.407,38.957 79.407,36.993 81.9,34.5 84.275,34.5 85.39,33.385 U2.2@85.39,32
NetC3_1: C3.1 JP1.1 JP2.1 Q5.2 R23.1 R45.2 U3.9 U4.1 U9.4 | length 51.9
  Top Layer w0.4: JP2.1@128.809,17.308 128.809,16.316 130.691,14.434 v2(131.857,14.434) ; v1(137.149,13.825) 137.2,13.774 137.2,9.875 141.251,5.824 ; v1@137.174,13.825 138,14.651 U4.1@138,22.8 ; JP1.1@141.225,3.899 141.225,5.824
  Bottom Layer w0.3: U3.9@131.857,11.857 v2(131.857,14.434) ; U4.1@138,22.8 139.393,21.407 140.307,21.407 142.693,23.793 R23.1@142.912,23.793 ; C3.1@140.088,20.907 C3.1@140.232,20.907 ; JP1.1@141.225,3.899 141.225,4.875 144.202,7.853 Q5.2@144.202,9.048 ; R23.1@142.518,23.193 R23.1@142.912,23.193 ; R23.1@143.293,23.193 R23.1@143.412,23.193
  Bottom Layer w0.4: v2(131.857,14.434) 132.149,14.725 134.124,14.725 135.024,13.825 v1(137.149,13.825)
  Bottom Layer w0.5: U9.4@128.525,21.45 128.525,17.592 JP2.1@128.809,17.308
NetC3_2: C3.2 C5.1 JP1.3 JP2.5 U3.7 U4.3 U9.2 | length 6.3
  Bottom Layer w0.3: U9.2@130.675,22.5 132.7,22.5 U4.3@133,22.8 ; v1(133.149,13.525) 133.157,13.516 U3.7@133.157,11.857 ; C5.1@142.975,18.7 C3.2@142.975,20.888 ; C5.1@143.388,18.718 C5.1@143.412,18.693
  other v2: 144.475,20.2
NetC5_2: C5.2 U3.8 | length 18.6
  Bottom Layer w0.3: U3.8@132.507,11.857 132.507,10.857 132.2,10.55 130.875,10.55 130.525,10.9 130.525,15.075 130.8,15.35 136.569,15.35 C5.2@140.112,18.893
NetC10_1: C10.1 JP7.1 R28.1 | length 23.1
  Bottom Layer w0.5: C10.1@45.243,21.013 R28.1@42.443,21.013 42.443,18.693 42.175,18.425 42.175,6.525 JP7.1@46.201,2.499
NetC11_1: C11.1 JP8.1 R31.1 | length 28.5
  Top Layer w0.5: v1(24.25,4.575) 29.025,4.575 JP8.1@31.101,2.499
  Bottom Layer w0.5: v1(24.25,4.575) 24.3,4.575 27.393,7.668 R31.1@27.393,21.088 C11.1@24.493,21.088
NetC14_2: C14.2 U1.6 | length 11.9
  Bottom Layer w0.3: C14.2@47.393,11.288 47.763,11.288 54.044,17.569 55.322,17.569 U1.6@56.278,18.524
NetD1_1: D1.1 JP4.1 | length 7.6
  Bottom Layer w1: D1.1@16,10.1 16.006,10.094 JP4.1@16.006,2.508
NetD3_1: D3.1 JP9.2 | length 3.8
  Bottom Layer w0.6: JP9.2@88.74,3.7 92.35,3.7 D3.1@92.45,3.8
NetJP1_2: JP1.2 Q5.3 | length 9.4
  Bottom Layer w0.3: JP1.2@136.399,3.899 JP1.2@136.225,3.899 138.576,6.25 139.775,6.25 142.002,8.478 Q5.3@142.002,9.998
NetJP2_3: JP2.3 U3.18 | length 10.8
  Bottom Layer w0.3: JP2.3@128.809,12.228 128.809,14.109 130.6,15.9 135.357,15.9 135.757,16.3 U3.18@135.757,17.357
NetJP2_4: JP2.4 U3.4 | length 7.8
  Bottom Layer w0.3: JP2.4@128.809,9.688 128.821,9.7 132.4,9.7 133.2,10.5 134.824,10.5 135.107,10.784 U3.4@135.107,11.857
NetJP5_1: JP5.1 U5.6 U6.6 U7.6 | length 37.3
  Top Layer w1: v1(113.4,4.325) v1(113.4,24.9) ; 113.4,12.5 113.412,12.512 JP5.1@122.408,12.512
  Bottom Layer w1: U5.6@110.725,4.26 v1@112.985,4.26 ; U6.6@110.725,14.56 113.385,14.56 v1(113.4,14.575) ; U7.6@110.725,24.86 113.36,24.86 v1(113.4,24.9) ; JP5.1@122.408,12.506 JP5.1@122.508,12.506
NetJP5_2: JP5.2 U5.4 | length 15.2
  Bottom Layer w1: U5.4@110.725,9.34 112.215,9.34 120.387,17.512 JP5.2@122.408,17.512 ; JP5.2@122.408,17.506 JP5.2@122.508,17.506
NetJP6_1: JP6.1 U6.4 | length 12.9
  Bottom Layer w1: U6.4@110.725,19.64 114.565,19.64 115.965,21.04 117.531,22.606 JP6.1@122.408,22.606
NetJP6_2: JP6.2 U7.4 | length 12.6
  Bottom Layer w1: U7.4@110.725,29.94 120.193,29.94 JP6.2@122.408,27.725
NetJP7_2: JP7.2 R29.2 R32.2 | length 19.2
  Bottom Layer w0.5: R29.2@39.607,21.012 39.607,18.199 R32.2@40.812,16.993 40.812,2.888 JP7.2@41.201,2.499
NetJP8_2: JP8.2 R33.2 | length 10.7
  Bottom Layer w0.5: JP8.2@26.101,2.499 26.101,3.551 31.543,8.993 R33.2@33.512,8.993
NetQ1_1: Q1.1 R1.1 | length 7.5
  Bottom Layer w0.4: Q1.1@19.648,56.326 20.273,55.7 25.275,55.7 26.287,56.712 R1.1@26.507,56.712